# EAGLE board pinoccio-test-top-right (EAGLE 6.2)
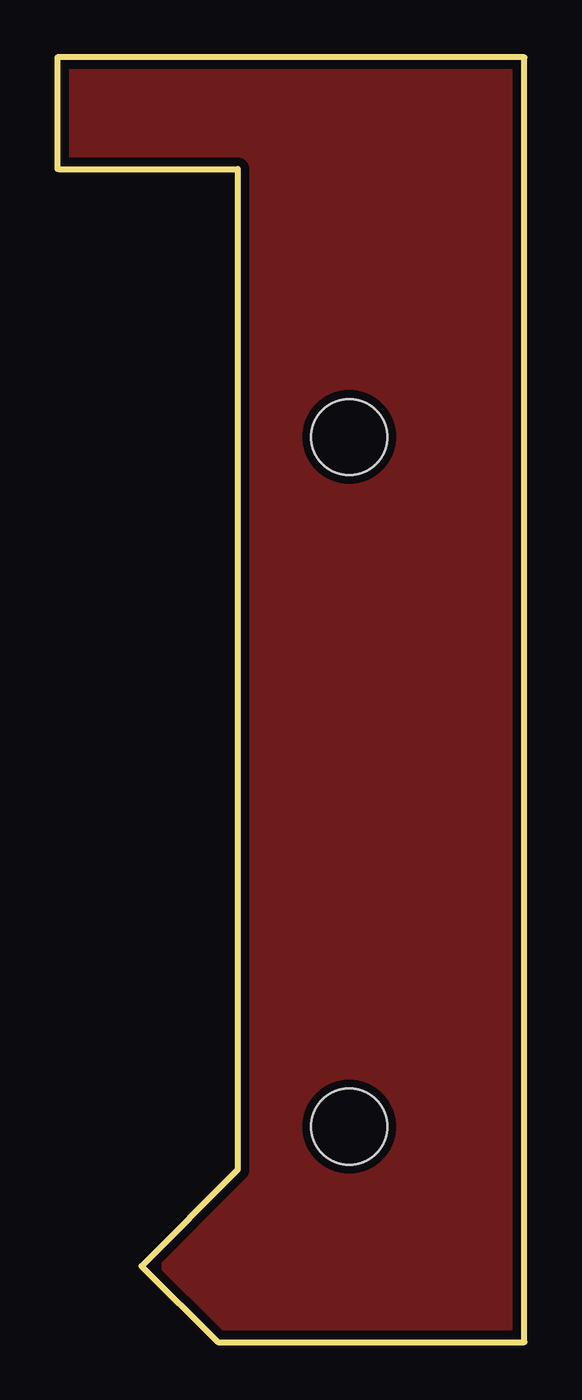
[diagram p0: board, top side]
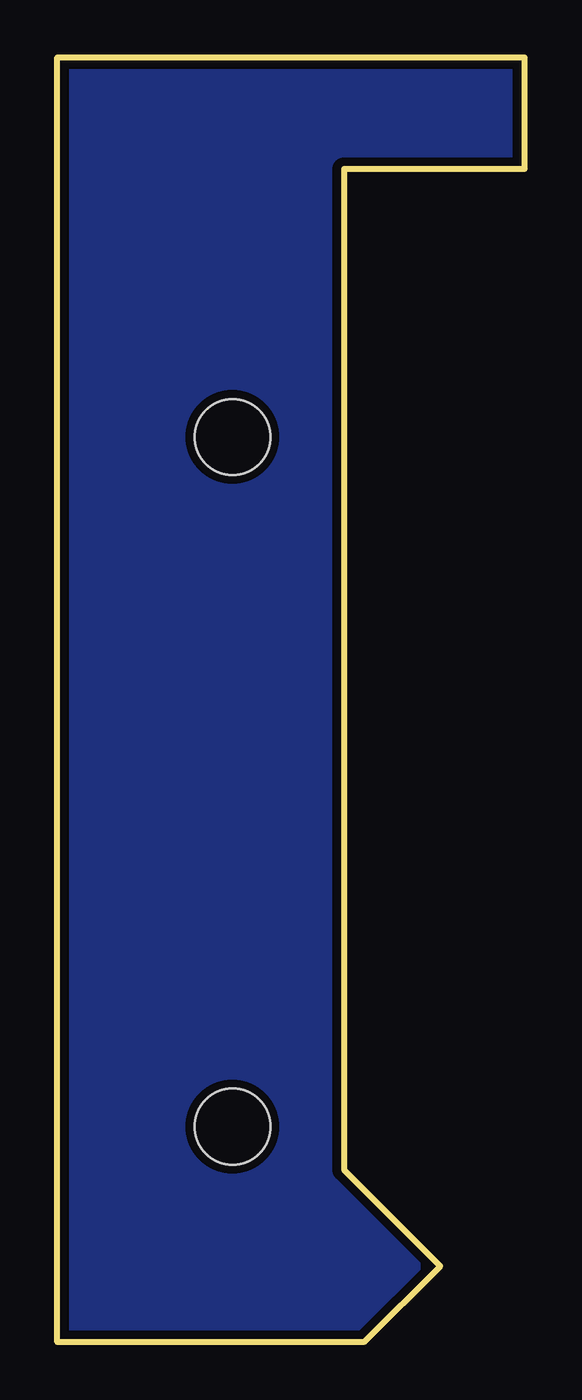
[diagram p1: board, bottom side, seen from below]

Size 20.32 x 55.88 mm. Coordinates in mm from the lower left corner, seen from the top.
Outline: 0,51.03 0,55.88 20.32,55.88 20.32,0 6.98,0 3.66,3.3 7.85,7.49 7.85,51.03 0.05,51.03
Copper layers (1*16): Top 0.0356mm / dielectric 1.5011mm / Bottom 0.0356mm
Design rules: minimum track width 6mil, minimum drill 13mil, track to track 6mil, track to pad 6mil, pad to pad 6mil, via to via 6mil, smd to smd 6mil, copper to edge 15mil, drill to drill 6mil, minimum pad ring 7mil, minimum via ring 7mil, stop-mask expansion 4mil, vias tented up to drill 16mil, thermal gap 10mil
Net classes: 0 Default: width 0.203 mm; 1 VCC: width 0.305 mm; 2 LEDPower: width 0.203 mm; 3 ButtonSignal: width 0.203 mm; 4 RF Antenna: width 0.305 mm; 5 GND: width 0.203 mm

## Footprints (pad centres in the part's own frame; a part is rotated, then mirrored left to right if it is on the bottom)
STAND-OFF = hole 3.302: 0,0

## Placement (x,y rotation side)
JP7  STAND-OFF  [STAND-OFF]  12.7,39.37 0 top
JP10  STAND-OFF  [STAND-OFF]  12.7,9.37 0 top

## Library data of the parts
JP7 JP10 = Pinoccio

## Tracks (layer width: path | path; a pad name or v marks a point on that pad's centre or on a via)
S$2
  pour Top: 0.23,55.7 20.17,55.7 20.17,0.1 7.19,0.1 3.99,3.3 8.05,7.37 8.05,51.13 0.23,51.13 0.23,55.65
S$3
  pour Bottom: 0.23,55.65 20.17,55.65 20.17,0.18 7.16,0.18 4.04,3.3 8.05,7.32 8.05,51.13 0.23,51.13 0.23,55.52

## Text on the board
tDocu: Pinoccio(tm) Scout Test Jig - Top Right v1.0 | Design by: Eric Jennings for Pinoccio | http://pinocc.io | Licensed under CERN OHL v.1.1